# Altium PCB Beacon.PcbDoc
Units mil, origin at the board's own origin, x right, y up, seen from the top; angles counter-clockwise.
Board outline 2700 x 2700 mil, 2 copper layers (Top Layer, Bottom Layer); 74 components, 48 nets, 207 pads, 3 vias.
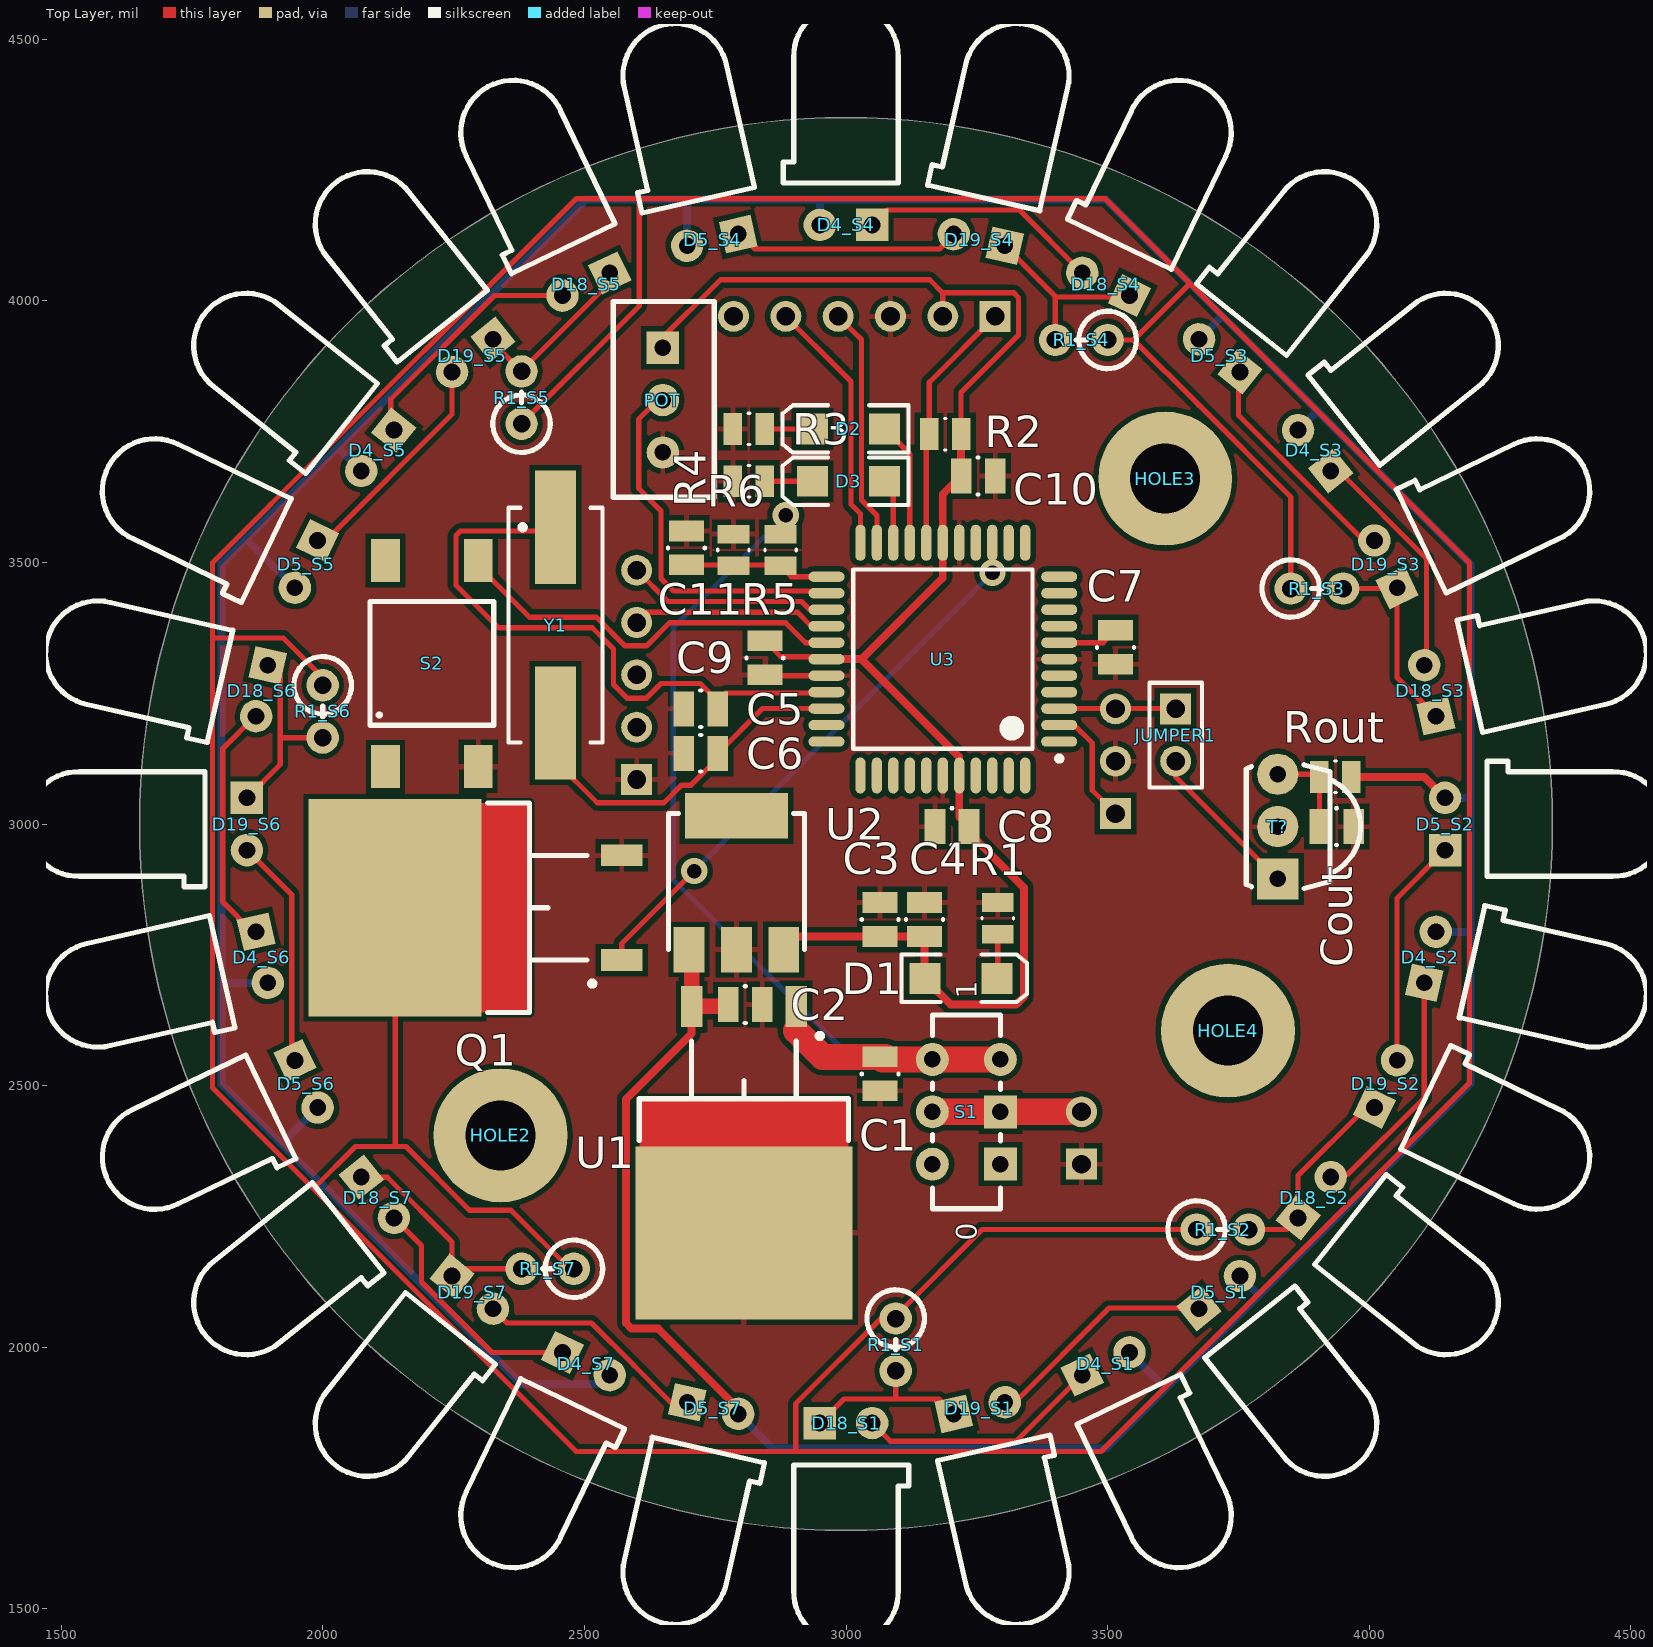
[diagram p0: Top Layer view]
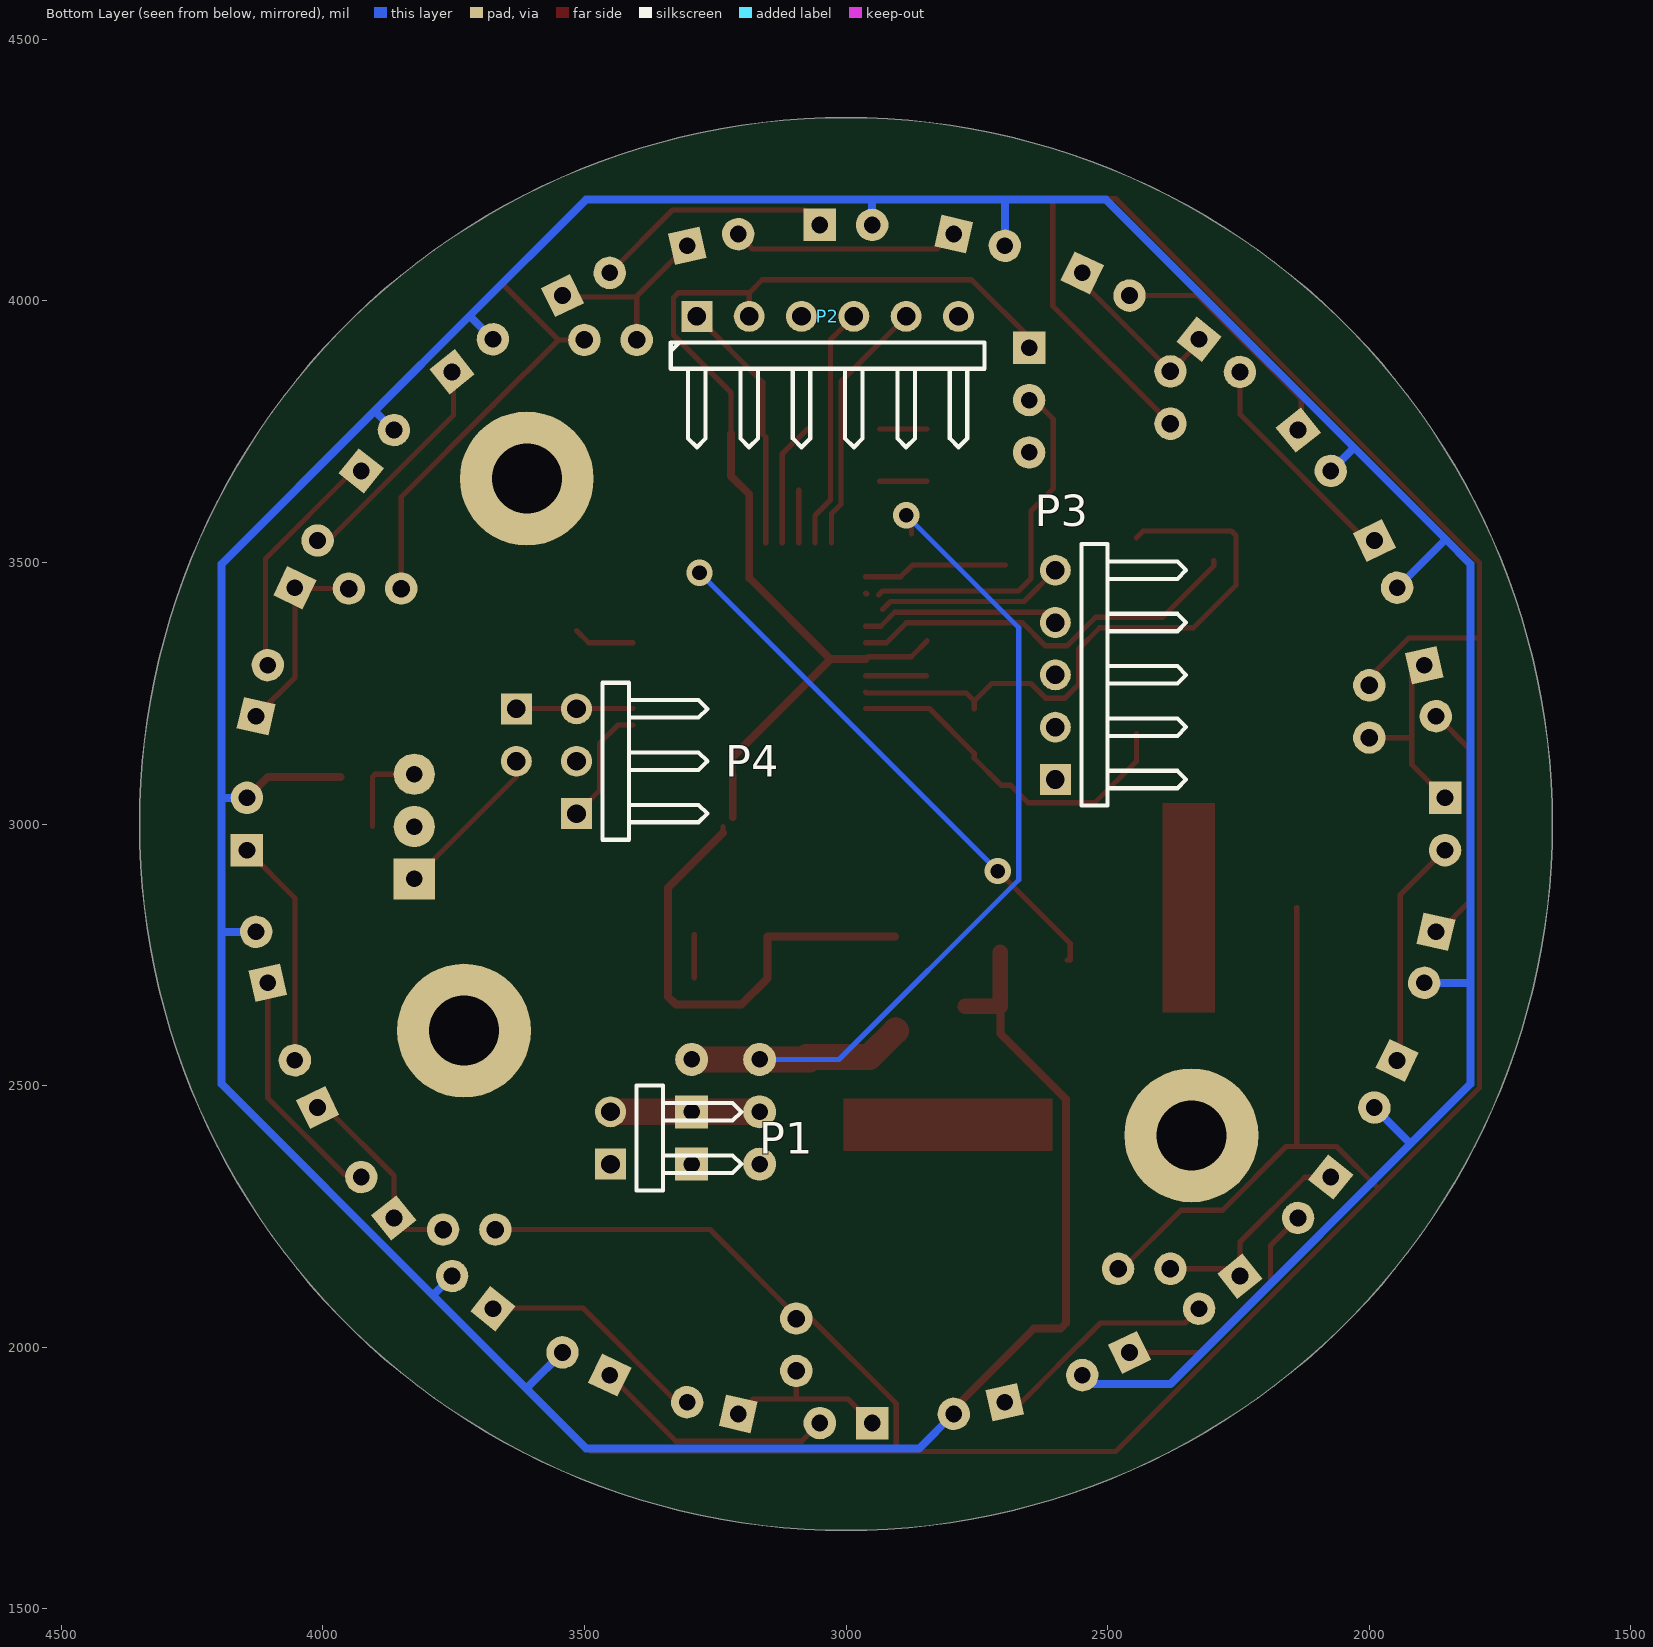
[diagram p1: Bottom Layer view, seen from below]
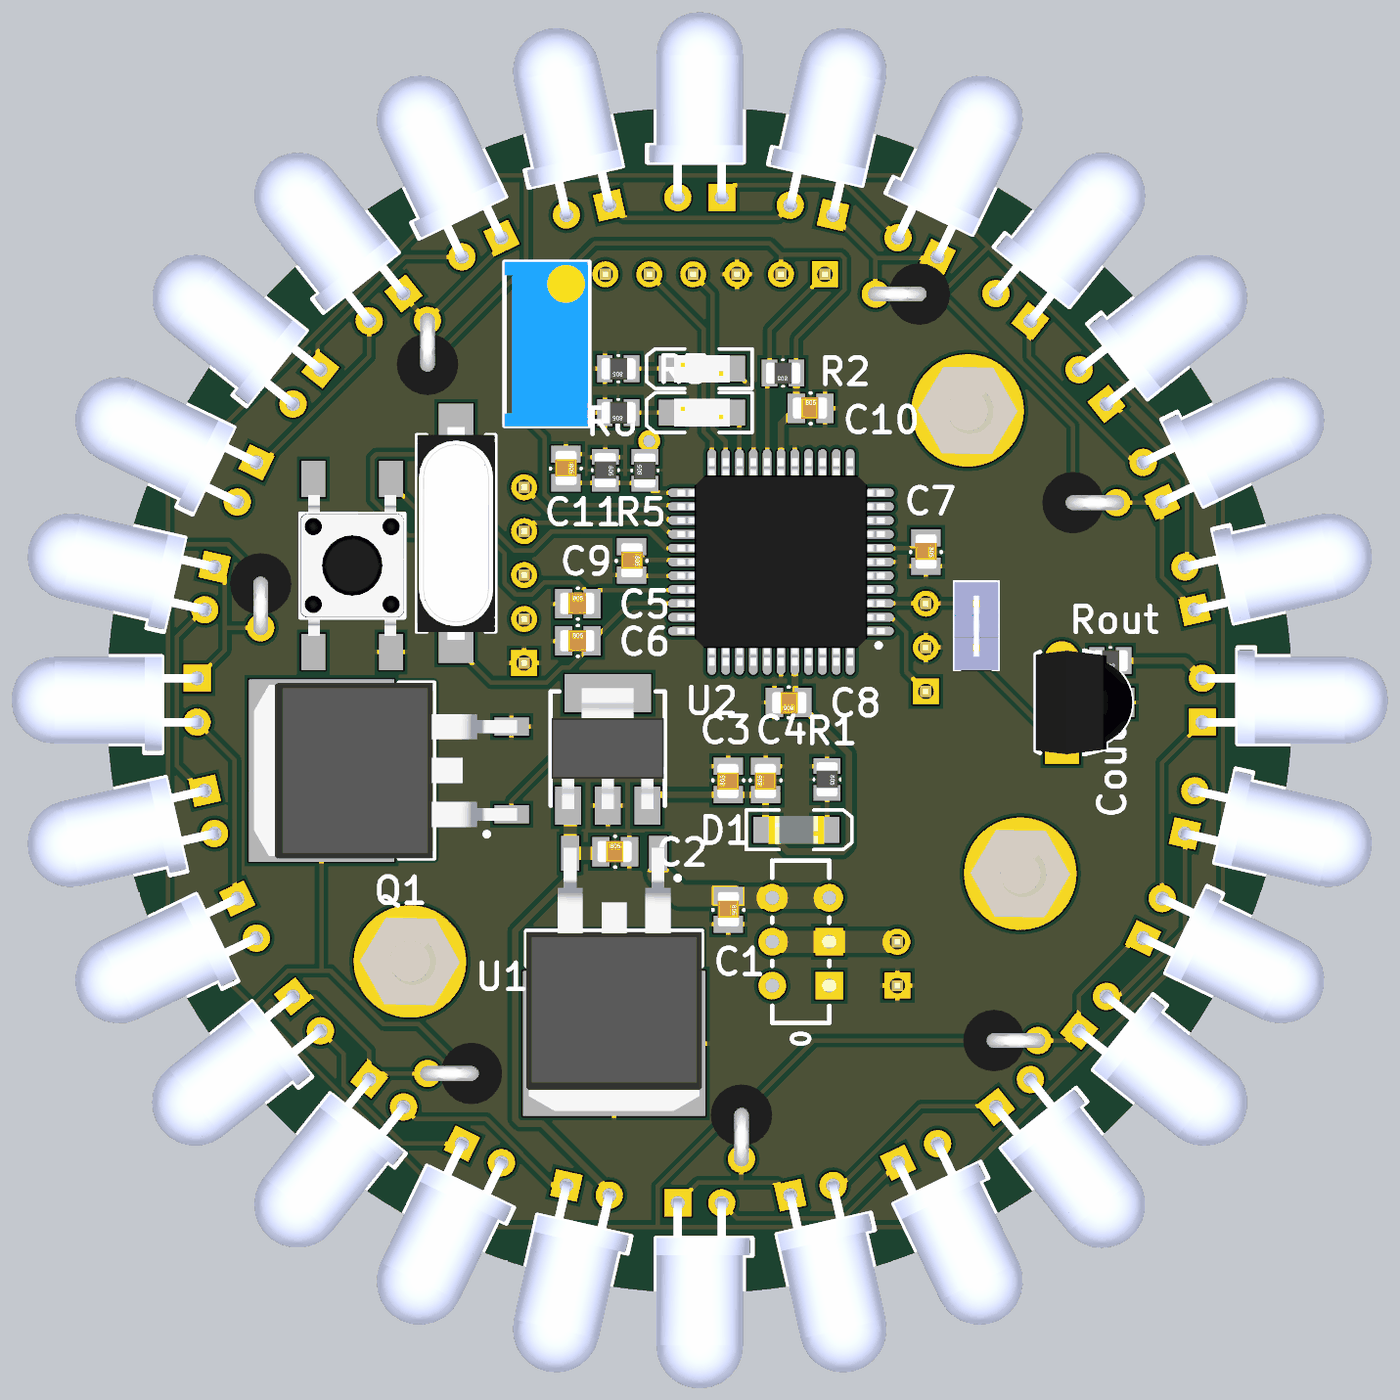
[diagram p2: 3D render of the assembled board from above, using the file's embedded part models]
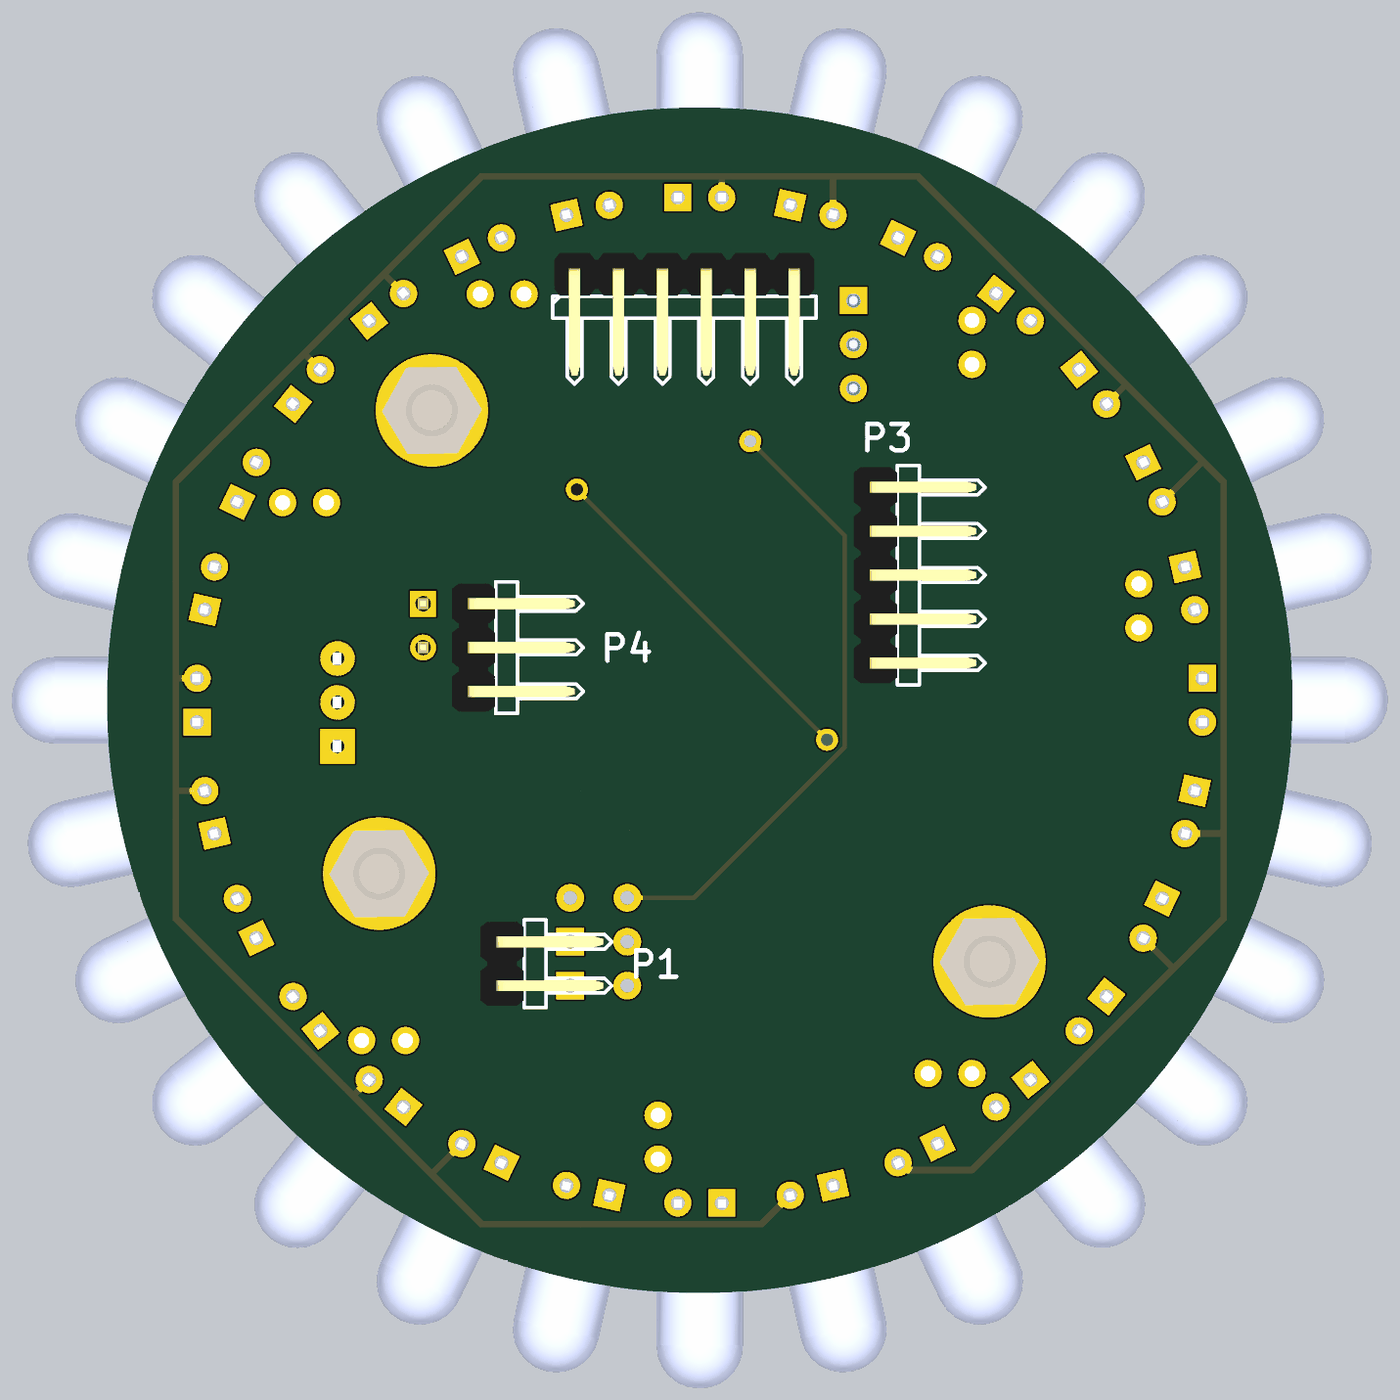
[diagram p3: 3D render of the assembled board from below, using the file's embedded part models]

## Layer stack, top to bottom
Top Layer: signal copper 1.4
Dielectric: dielectric 12.6, FR-4, Dk 4.8
Bottom Layer: signal copper 1.4

## Board outline
3000,1650 cw(c3000,3000) 1650,3000 cw(c3000,3000) 3000,4350 cw(c3000,3000) 4350,3000 cw(c3000,3000)

## Design rules (kind name [scope] priority, off if disabled: settings)
Clearance [All] p1: gap=10
HoleSize [All] p1: absolutevalues=TRUE maxlimit=140 minlimit=1 maxpercent=80.000 minpercent=20.000
MinimumSolderMaskSliver [All] p1: minsoldermaskwidth=1
PolygonConnect [All] p1: connectstyle=Relief reliefconductorwidth=10 reliefentries=4 polygonreliefangle="90 Angle"
RoutingVias [All] p1: holewidth=28 width=50 viastyle="Through Hole" minholewidth=28 minwidth=50 maxholewidth=28 maxwidth=50
SilkToSilkClearance [All] p1: silktosilkclearance=1
SilkscreenOverComponentPads [All] p1: minsilkscreentomaskgap=1
SolderMaskExpansion [All] p1: expansion=4
Width Width_2 [(InNet('VBAT') OR InNet('NetP1_2'))] p1: maxlimit=50 minlimit=5 preferedwidth=50
Width Width_1 [InNet('+5V0')] p2: maxlimit=50 minlimit=15 preferedwidth=15
Width [All] p3: maxlimit=20 minlimit=10 preferedwidth=10
24 further rules are at their usual default settings.

## Classes and differential pairs
component class beacon1: C1 C2 C3 C4 C5 C6 C7 C8 C9 C10 C11 Cout D1 D2 D3 HOLE2 HOLE3 HOLE4 JUMPER1 P1 P3 P4 POT Q1 R1 R2 R3 R4 R5 R6 Rout S1 S2 T? U1 U2 U3 Y1
component class S1: D4_S1 D5_S1 D18_S1 D19_S1 R1_S1
component class S2: D4_S2 D5_S2 D18_S2 D19_S2 R1_S2
component class S3: D4_S3 D5_S3 D18_S3 D19_S3 R1_S3
component class S4: D4_S4 D5_S4 D18_S4 D19_S4 R1_S4
component class S5: D4_S5 D5_S5 D18_S5 D19_S5 R1_S5
component class S6: D4_S6 D5_S6 D18_S6 D19_S6 R1_S6
component class S7: D4_S7 D5_S7 D18_S7 D19_S7 R1_S7
channel class emitter: S1 S2 S3 S4 S5 S6 S7

## Components (designator, comment, footprint, x,y, rotation, side; value= is the part's Value field where it differs from the comment)
C1 "" C0805C 3065,2555 r270 top
C2 "" C0805C 2775,2655 r0 top
C3 "" C0805C 3065,2785 r90 top
C4 "" C0805C 3150,2785 r90 top
C5 "CAP" C0805C 2690,3220 r0 top
C6 "CAP" C0805C 2690,3135 r0 top
C7 "" C0805C 3515,3370 r270 top
C8 "" C0805C 3235,2995 r180 top
C9 "" C0805C 2845,3350 r270 top
C10 "" C0805C 3220,3665 r0 top
C11 "CAP" C0805C 2695,3560 r270 top
Cout "CAP" C0805C 3905,2995 r0 top
D1 "LED2" LED1206G 3220,2705 r0 top
D2 "LED2" LED1206R 3005,3755 r180 top
D3 "LED2" LED1206R 3005,3655 r180 top
D4_S1 "LED" "LED 5MM Horiz" 3000,3000 r25.71 top (schematic designator D4)
D4_S2 "LED" "LED 5MM Horiz" 3000,3000 r77.14 top (schematic designator D4)
D4_S3 "LED" "LED 5MM Horiz" 3000,3000 r128.57 top (schematic designator D4)
D4_S4 "LED" "LED 5MM Horiz" 3000,3000 r180 top (schematic designator D4)
D4_S5 "LED" "LED 5MM Horiz" 3000,3000 r231.43 top (schematic designator D4)
D4_S6 "LED" "LED 5MM Horiz" 3000,3000 r282.86 top (schematic designator D4)
D4_S7 "LED" "LED 5MM Horiz" 3000,3000 r334.29 top (schematic designator D4)
D5_S1 "LED" "LED 5MM Horiz" 3000,3000 r38.57 top (schematic designator D5)
D5_S2 "LED" "LED 5MM Horiz" 3000,3000 r90 top (schematic designator D5)
D5_S3 "LED" "LED 5MM Horiz" 3000,3000 r141.43 top (schematic designator D5)
D5_S4 "LED" "LED 5MM Horiz" 3000,3000 r192.86 top (schematic designator D5)
D5_S5 "LED" "LED 5MM Horiz" 3000,3000 r244.29 top (schematic designator D5)
D5_S6 "LED" "LED 5MM Horiz" 3000,3000 r295.72 top (schematic designator D5)
D5_S7 "LED" "LED 5MM Horiz" 3000,3000 r347.14 top (schematic designator D5)
D18_S1 "LED" "LED 5MM Horiz" 3000,3000 r0 top (schematic designator D18)
D18_S2 "LED" "LED 5MM Horiz" 3000,3000 r51.43 top (schematic designator D18)
D18_S3 "LED" "LED 5MM Horiz" 3000,3000 r102.86 top (schematic designator D18)
D18_S4 "LED" "LED 5MM Horiz" 3000,3000 r154.29 top (schematic designator D18)
D18_S5 "LED" "LED 5MM Horiz" 3000,3000 r205.71 top (schematic designator D18)
D18_S6 "LED" "LED 5MM Horiz" 3000,3000 r257.14 top (schematic designator D18)
D18_S7 "LED" "LED 5MM Horiz" 3000,3000 r308.57 top (schematic designator D18)
D19_S1 "LED" "LED 5MM Horiz" 3000,3000 r12.86 top (schematic designator D19)
D19_S2 "LED" "LED 5MM Horiz" 3000,3000 r64.29 top (schematic designator D19)
D19_S3 "LED" "LED 5MM Horiz" 3000,3000 r115.71 top (schematic designator D19)
D19_S4 "LED" "LED 5MM Horiz" 3000,3000 r167.14 top (schematic designator D19)
D19_S5 "LED" "LED 5MM Horiz" 3000,3000 r218.57 top (schematic designator D19)
D19_S6 "LED" "LED 5MM Horiz" 3000,3000 r270 top (schematic designator D19)
D19_S7 "LED" "LED 5MM Horiz" 3000,3000 r321.43 top (schematic designator D19)
HOLE2 "Hole" SCREW 2340,2405 r0 top
HOLE3 "Hole" SCREW 3610,3660 r0 top
HOLE4 "Hole" SCREW 3730,2605 r0 top
JUMPER1 "ENABLE_TSOP" HDR1X2J 3630,3220 r270 top
P1 "Battery" HDR1X2H 3450,2350 r90 bottom
P2 "PICkit" HDR1X6H 3285,3970 r180 bottom
P3 "FTDI Cable" HDR1X5H 2600,3085 r90 bottom
P4 "SYNC" HDR1X3H 3515,3020 r90 bottom
POT "1K" "VR5 POT" 2650,3910 r270 top
Q1 "IRF640NS" D2PAK 2355,2840 r90 top
R1 "" C0805R 3290,2850 r270 top
R1_S1 "RES" "AXIAL0.8 Vert" 3095,2055 r270 top (schematic designator R1)
R1_S2 "RES" "AXIAL0.8 Vert" 3670,2225 r0 top (schematic designator R1)
R1_S3 "RES" "AXIAL0.8 Vert" 3850,3450 r0 top (schematic designator R1)
R1_S4 "RES" "AXIAL0.8 Vert" 3500,3925 r180 top (schematic designator R1)
R1_S5 "RES" "AXIAL0.8 Vert" 2380,3765 r90 top (schematic designator R1)
R1_S6 "RES" "AXIAL0.8 Vert" 2000,3265 r270 top (schematic designator R1)
R1_S7 "RES" "AXIAL0.8 Vert" 2480,2150 r180 top (schematic designator R1)
R2 "" C0805R 3220,3745 r180 top
R3 "" C0805R 2845,3755 r180 top
R4 "" C0805R 2845,3655 r180 top
R5 "RES" C0805R 2875,3493.07 r90 top
R6 "RES" C0805R 2785,3554.09 r270 top
Rout "RES" C0805R 3965.67,3090 r180 top
S1 "SW-DPDT/Reset" MCLSS22 3295,2450 r90 top
S2 "SPST-NO" SPST-NO 2120,3110 r0 top
T? "TSOP7000" "TSOP IR" 2410.67,2995 r90 top
U1 "L7805CD2T" D2PAK 2805,2435 r180 top
U2 "LM2937IMP-3.3" SOT223 2700,2760 r0 top
U3 "DSPIC33FJ64MC804-I/PT" TQFP-PT44_N 3185,3315 r180 top
Y1 "XTAL" "HC49SMD C" 2445,3380 r270 top

## Footprints (in the part's own frame and the unit in brackets; to place one, negate y for a bottom-side part, rotate by r counter-clockwise, add the part's x,y. Pads: shape width x height; smd on the part's side, far side on the other; paste and mask are expansions set on the pad)
"AXIAL0.8 Vert" [mil] "Resistor 1/4W vertical"
  round 62 hole 33.46: 1(0,0) 2(100,0)
  silkscreen extent -55,-55 60,55, body extent -70,-70 117,70, height 435
C0805C [mm]
  rect 1x1.7 smd: 1(0,0) 2(1.65,0)
  silkscreen extent 0.8,-0.89 0.85,0.89, body extent -0.21,-0.61 1.79,0.64, height 0.78
C0805R [mm]
  rect 0.9x1.55 smd: 1(0,0) 2(1.55,0)
  silkscreen extent 0.73,-0.76 0.81,0.76, body extent -0.24,-0.62 1.76,0.63, height 0.78
D2PAK [mm] "Power SMT D2-PAK/TO-263-AB; 3 Leads (1 Cropped); Body 15.5 (inc. leads) x 10.5 mm (LxW max)"
  rect 1.05x2 smd: 1(-2.54,-5.5) 3(2.54,-5.5)
  rect 10.55x8.4 smd: 2(0,5.5)
  Top Layer region: -5.08,-1.016 5.08,-1.016 5.08,1.524 -5.08,1.524
  silkscreen extent -5.08,-4.19 5.08,1.02, body extent -5.08,-5.86 5.08,9.4, height 4.78
"HC49SMD C" [mm] "Quartz Crystal, SMD thickness C; Body 13.4 (inc. leads) x 4.9 mm (LxW max)"
  rect 5.5x2 smd: 1(-4.75,0) 2(4.75,0)
  silkscreen extent -5.7,-2.29 5.7,2.29, body extent -6.15,-2.25 6.15,2.25, height 3.6
HDR1X2H [mm] "Connector; Header; 2 Position; Right Angle"
  rect 1.5x1.5 hole 0.9: 1(0,0)
  round 1.5 hole 0.9: 2(2.54,0)
  silkscreen extent -1.27,-6.35 3.81,-1.27, body extent -1.17,-5.85 3.71,1.25, height 5.42
HDR1X2J [mm] "Jumper; Connector; Header; 2 Position"
  rect 1.5x1.5 hole 0.9: 1(0,0)
  round 1.5 hole 0.9: 2(2.54,0)
  silkscreen extent -1.27,-1.27 3.81,1.27, body extent -1.24,-1.27 3.91,1.27, height 8.55
HDR1X3H [mm] "Connector; Header; 3 Position; Right Angle"
  rect 1.5x1.5 hole 0.9: 1(0,0)
  round 1.5 hole 0.9: 2(2.54,0) 3(5.08,0)
  silkscreen extent -1.27,-6.35 6.35,-1.27, body extent -1.17,-5.85 6.25,1.25, height 5.42
HDR1X5H [mm] "Connector; Header; 5 Position; Right Angle"
  rect 1.5x1.5 hole 0.9: 1(0,0)
  round 1.5 hole 0.9: 2(2.54,0) 3(5.08,0) 4(7.62,0) 5(10.16,0)
  silkscreen extent -1.27,-6.35 11.43,-1.27, body extent -1.17,-5.85 11.33,1.25, height 5.42
HDR1X6H [mm] "Connector; Header; 6 Position; Right Angle"
  rect 1.5x1.5 hole 0.9: 1(0,0)
  round 1.5 hole 0.9: 2(2.54,0) 3(5.08,0) 4(7.62,0) 5(10.16,0) 6(12.7,0)
  silkscreen extent -1.27,-6.35 13.97,-1.27, body extent -1.17,-5.85 13.87,1.25, height 5.42
LED1206G [mm] "SMT LED; 2 Flat Leads; 3.2X1.6X1.1"
  rect 1.5x1.5 smd: 1(-1.75,0) 2(1.75,0)
  silkscreen extent -2.9,-1.15 3.2,1.15, body extent -1.6,-0.8 1.6,0.8, height 1.11
LED1206R [mm] "SMT LED; 2 Flat Leads; 3.2X1.6X1.1"
  rect 1.5x1.5 smd: 1(-1.75,0) 2(1.75,0)
  silkscreen extent -2.9,-1.15 3.2,1.15, body extent -1.6,-0.8 1.6,0.8, height 1.11
"LED 5MM Horiz" [mil] "LED 5mm Right Angle"
  round 62 hole 32: A(50,-1144.8)
  rect 62x62 hole 32: K(-50,-1144.8)
  silkscreen extent -100,-1566 120,-1225, body extent -98,-1567 114,-1136, height 232
MCLSS22 [mm] "Slide Switch DPDT"
  rect 1.6x1.6 hole 0.8: 1(0,0) 2(-2.54,0)
  round 1.6 hole 0.8: 3(2.54,0) 4(0,3.3) 5(-2.54,3.3) 6(2.54,3.3)
  silkscreen extent -4.7,0 4.7,3.3, body extent -4.7,-2 4.7,3.3, height 3.5
SCREW [mm] "Mounting Hole M3"
  round 6.5 hole 3.4: 1(0,0)
  body extent -2.89,-2.52 2.89,2.52, height 10
SOT223 [mm]
  rect 1.5x2.2 smd: 1(0,0) 2(2.3,0) 3(4.6,0)
  rect 5x2.2 smd: ""(2.3,6.5)
  silkscreen extent -1,0 5.6,6.6, body extent -0.95,-0.2 5.55,6.8, height 1.64
SPST-NO [mm] "Tactile Switch SPST-NO 6x6mm"
  rect 1.4x2.1 smd: 1(0,0) 2(4.5,0) 3(4.5,10) 4(0,10)
  silkscreen extent -0.75,2 5.25,8, body extent -0.75,0.93 5.25,9.08, height 5
TQFP-PT44_N [mm] "Thin QFP, 44-Leads, Body 10x10mm, Pitch 0.8mm, IPC Medium Density"
  oval 1.75x0.5 smd: 1(-5.65,4) 2(-5.65,3.2) 3(-5.65,2.4) 4(-5.65,1.6) 5(-5.65,0.8) 6(-5.65,0) 7(-5.65,-0.8) 8(-5.65,-1.6) 9(-5.65,-2.4) 10(-5.65,-3.2) 11(-5.65,-4) 23(5.65,-4) 24(5.65,-3.2) 25(5.65,-2.4) 26(5.65,-1.6) 27(5.65,-0.8) 28(5.65,0) 29(5.65,0.8) 30(5.65,1.6) 31(5.65,2.4) 32(5.65,3.2) 33(5.65,4)
  oval 0.5x1.75 smd: 12(-4,-5.65) 13(-3.2,-5.65) 14(-2.4,-5.65) 15(-1.6,-5.65) 16(-0.8,-5.65) 17(0,-5.65) 18(0.8,-5.65) 19(1.6,-5.65) 20(2.4,-5.65) 21(3.2,-5.65) 22(4,-5.65) 34(4,5.65) 35(3.2,5.65) 36(2.4,5.65) 37(1.6,5.65) 38(0.8,5.65) 39(0,5.65) 40(-0.8,5.65) 41(-1.6,5.65) 42(-2.4,5.65) 43(-3.2,5.65) 44(-4,5.65)
  silkscreen extent -5.77,-4.35 4.35,4.95, body extent -6,-6 6,6, height 1.05
"TSOP IR" [mm] "TSOP IR Receiver, Vishay"
  rect 2x2 hole 0.8: 1(-2.54,-35.924)
  round 2 hole 0.8: 2(0,-35.924) 3(2.54,-35.924)
  silkscreen extent -3,-39.95 3,-34.4, body extent -3,-40 3,-34.4, height 8.45
"VR5 POT" [mil] "Potentiometre ajustable"
  rect 62x62 hole 31.5: 1(0,0)
  round 62 hole 31.5: 2(100,0) 3(200,0)
  silkscreen extent -89,-95 285,98, body extent -88,-95 287,96, height 455

## Part data
C1 C2 C3 C4 C7 C8 C9 C10: library part "Cap Semi", "Capacitor (Semiconductor SIM Model)"
C5 C6 C11 Cout: "Capacitor"
D1 D2 D3 D4_S1 D4_S2 D4_S3 D4_S4 D4_S5 D4_S6 D4_S7 D5_S1 D5_S2 D5_S3 D5_S4 D5_S5 D5_S6 D5_S7 D18_S1 D18_S2 D18_S3 D18_S4 D18_S5 D18_S6 D18_S7 D19_S1 D19_S2 D19_S3 D19_S4 D19_S5 D19_S6 D19_S7: "Typical RED, GREEN, YELLOW, AMBER GaAs LED"
HOLE2 HOLE3 HOLE4: "Mounting Hole for screws"
JUMPER1 P1: library part "Header 2", "Header, 2-Pin"
P2: library part "Header ICSP", "Header, 6-Pin, Right Angle"
P3: library part "Header 5", "Header, 5-Pin"
P4: library part "Header 3", "Header, 3-Pin"
POT: library part POT, "Potentiometer"
Q1: library part IRF640, "N-Channel MOSFET, D2PAK (T0-263), InternationalRectifier"
R1 R2 R3 R4: library part Res3, "Resistor"
R1_S1 R1_S2 R1_S3 R1_S4 R1_S5 R1_S6 R1_S7 R5 R6 Rout: "Resistor"
S1: library part SW-DPDT, "Double-Pole, Double-Throw Switch"
S2: "Tactile Switch 7.3mm, SMD"
T?: "Vishay 455kHz IR Receiver"
U1: "5V Linear Regulator, D2PAK, ST Microelectronics"
U2: "500 mA Low Dropout Regulator"
U3: "High-Performance 16-bit Digital Signal Controller, 64 KB Flash, 16 KB RAM, 44-Pin TQFP, Industrial Temperature"
Y1: "Crystal Oscillator"

## Via types
v1: diameter 50, hole 28, Top Layer to Bottom Layer, 3 vias

## Nets (pads, with @x,y where several pads share a name; then routed paths per layer and width w, separated by ;. In a path a pad name is that pad's centre, name@x,y a point inside that pad or via, vN(x,y) a via of type N, cw(c..) or ccw(c..) an arc to the next point about the centre after c; other vN are vias at no path point)
+3V3: C3.1 C4.1 C8.1 C9.1 C10.1 D1.1 P2.2 POT.1 R2.1 U2.3 U3.17 U3.28 U3.40 | length 3109
  Top Layer w10: POT.1@2640,3910 2640,3920 2760,4040 3160,4040 3185,4015 ; C9.1 2875.28,3319.72 2957.83,3319.72 U3.28 ; D1.1@3151.1,2703.9 D1.1 ; P2.2 3185,4015 ; U3.40 3216.5,3128.21 ; R2.1 3220,3824.73 3329.53,3934.26 3329.53,4005.74 3320.74,4014.53 ; C8.1@3235,2983.23 C8.1 ; 3320.74,4015 3185,4015
  Top Layer w15: U2.3@2906.1,2785 C3.1 C4.1 D1.1@3150,2706.1 ; U3.28 3029.71,3315 ; D1.1@3151.1,2703.9 3200,2655 3325,2655 3340,2670 3340,2878.23 C8.1@3235,2983.23 ; C8.1@3216.5,3013.5 U3.40 ; 3216.5,3128.21 3029.71,3315 ; R2.1 C10.1 3185,3630 U3.17 3185,3470.29 3029.71,3315
+5V0: C2.1 D4_S1.A D4_S2.A D4_S3.A D4_S4.A D4_S5.A D4_S6.A D4_S7.A D5_S1.A D5_S2.A D5_S3.A D5_S4.A D5_S5.A D5_S6.A D5_S7.A Rout.1 U1.3 U2.1 | length 9835.4
  Top Layer w15: U1.3 2705,2599.75 2579.82,2474.57 2579.82,2045.86 2590.07,2035.61 2641.08,2035.61 2793.95,1882.74 D5_S7.A ; Rout.1 4104.8,3090 D5_S2.A
  Top Layer w30: U2.1@2705,2755 U1.3 C2.1@2771.54,2651.54
  Bottom Layer w15: D4_S6.A 1808.15,2696.46 1806.7,2695 ; 1921.11,2388.93 D5_S6.A ; D5_S5.A 1855.02,3543.4 1855.02,3544.98 ; 2035,3713.42 D4_S5.A ; D4_S7.A@2540,1930 2380.05,1930 1806.7,2503.35 1806.7,2695 ; D5_S4.A 2696.46,4191.85 2695,4193.3 ; D5_S7.A 2860.03,1806.7 3496.65,1806.7 3792.48,2102.52 ; D4_S4.A 2950,4193.3 ; D4_S1.A 3605,1926.91 ; D5_S3.A 3718.42,3970 3719.95,3970 ; D5_S1.A 3786.43,2102.52 3792.48,2102.52 ; D4_S3.A 3899.95,3788.91 3899.95,3790 ; D4_S2.A 4192.25,2793.95 4193.3,2795 ; D5_S2.A 4193.3,3050 ; 1806.7,2695 1806.7,3496.65 1855.02,3544.98 ; 1855.02,3544.98 2503.35,4193.3 2695,4193.3 ; 2695,4193.3 2950,4193.3 ; 2950,4193.3 3496.65,4193.3 3719.95,3970 ; 3719.95,3970 3899.95,3790 ; 3792.48,2102.52 4193.3,2503.35 4193.3,2795 ; 3899.95,3790 4193.3,3496.65 4193.3,3050 ; 4193.3,2795 4193.3,3050
GATE: Q1.1 U3.14 | length 1039.8
  Top Layer w10: Q1.1@2577.17,2740 Q1.1 2571.54,2771.54 v1(2710,2910) ; v1@3279.49,3480.51 v1(3280,3480)
  Bottom Layer w10: v1(2710,2910) v1(3280,3480)
GND: C1.2 C2.2 C3.2 C4.2 C5.1 C6.1 C7.2 C8.2 C9.2 C10.2 C11.1 Cout.2 P1.1 P2.3 P3.1 P4.2 POT.3 Q1.3 R1.1 R3.2 R4.2 R6.1 S2.2 T?.2 U1.2 U2.2 U3.6 U3.16 U3.29 U3.39 | length 116
  Top Layer w10: C9.2@2846.54,3283.5 U3.29
MCLR: P2.1 R2.2 U3.18 | length 479.3
  Top Layer w10: U3.18 R2.2@3153.5,3739.53 ; R2.2 3158.98,3843.98 P2.1
NetC7_1: C7.1 U3.7 | length 117.3
  Top Layer w10: U3.7 3491.5,3346.5 C7.1
NetC11_2: C11.2 R5.1 R6.2 U3.23 | length 274.1
  Top Layer w10: C11.2 R5.1@2873.03,3495.04 ; R5.1 2895.59,3472.48 U3.23
NetCout_1: Cout.1 Rout.2 T?.3 | length 176.4
  Top Layer w10: T?.3 3899.65,3095 Rout.2 Cout.1@3904.65,2995.35
NetD1_2: D1.2 R1.2 | length 82.9
  Top Layer w10: D1.2@3290,2706.1 R1.2
NetD2_1: D2.1 U3.19 | length 237.5
  Top Layer w10: D2.1 3122.01,3706.89 U3.19
NetD2_2: D2.2 R3.1 | length 91.1
  Top Layer w10: R3.1 D2.2
NetD3_1: D3.1 U3.20 | length 100.9
  Top Layer w10: U3.20 D3.1@3090.51,3638.39
NetD3_2: D3.2 R4.1 | length 91.1
  Top Layer w10: R4.1 D3.2
NetD4_S1_K: D4_S1.K D18_S1.A | length 468.2
  Top Layer w10: D18_S1.A 3084.54,1820.66 3325.41,1820.66 D4_S1.K
NetD4_S2_K: D4_S2.K D18_S2.A | length 461.3
  Top Layer w10: D18_S2.A 3930.89,2330 3958.54,2330 4104.96,2476.42 D4_S2.K
NetD4_S3_K: D4_S3.K D18_S3.A | length 458.4
  Top Layer w10: D4_S3.K 3926.58,3675 3941.52,3675 4109.54,3506.98 4109.54,3308.12 D18_S3.A
NetD4_S4_K: D4_S4.K D18_S4.A | length 463.2
  Top Layer w10: D4_S4.K 3050,4145 3078.22,4173.22 3331.53,4173.22 D18_S4.A
NetD4_S5_K: D4_S5.K D18_S5.A | length 471.8
  Top Layer w10: D4_S5.K 2130,3758.96 2130,3811.78 2327.99,4009.78 D18_S5.A
NetD4_S6_K: D4_S6.K D18_S6.A | length 469.7
  Top Layer w10: D4_S6.K 1866.05,2793.95 1809.2,2850.8 1809.2,3144.2 1871.05,3206.05 D18_S6.A
NetD4_S7_K: D4_S7.K D18_S7.A | length 469.5
  Top Layer w10: D18_S7.A 2188.59,2194.68 2188.59,2124.99 2323.36,1990.22 D4_S7.K
NetD5_S1_K: D5_S1.K D19_S1.A | length 446.2
  Top Layer w10: D19_S1.A 3322.71,1895.04 3502.67,2075 3673.42,2075 D5_S1.K
NetD5_S2_K: D5_S2.K D19_S2.A | length 439.8
  Top Layer w10: D19_S2.A 4052.84,2548.74 4052.84,2858.03 D5_S2.K
NetD5_S3_K: D5_S3.K D19_S3.A | length 444.2
  Top Layer w10: D5_S3.K 3750,3861.04 3750,3781.21 3991.21,3540 4008.09,3540 D19_S3.A
NetD5_S4_K: D5_S4.K D19_S4.A | length 436.3
  Top Layer w10: D5_S4.K 2797.78,4127.22 2826.2,4098.8 3178.8,4098.8 3206.05,4126.05 D19_S4.A
NetD5_S5_K: D5_S5.K D19_S5.A | length 439.2
  Top Layer w10: D5_S5.K 1991.91,3540 2004.16,3540 2247.16,3783 D19_S5.A
NetD5_S6_K: D5_S6.K D19_S6.A | length 439.8
  Top Layer w10: D19_S6.A 1941.04,2864.16 1941.04,2554.11 D5_S6.K
NetD5_S7_K: D5_S7.K D19_S7.A | length 445.3
  Top Layer w10: D19_S7.A 2352.51,2046.6 2513.71,2046.6 2594.42,1965.89 2594.42,1965.58 2664.96,1895.04 D5_S7.K
NetD18_S1_K: D18_S1.K D19_S1.K R1_S1.2 | length 335.7
  Top Layer w10: D18_S1.K 2996,1901.2 3177.64,1901.2 D19_S1.K ; 3095,1906.2 R1_S1.2
NetD18_S2_K: D18_S2.K D19_S2.K R1_S2.2 | length 383.8
  Top Layer w10: R1_S2.2 3841.73,2225 D18_S2.K 3863.89,2328.05 3990.84,2455 4006.46,2455 D19_S2.K
NetD18_S3_K: D18_S3.K D19_S3.K R1_S3.2 | length 380
  Top Layer w10: R1_S3.2 4051.58,3450 D19_S3.K 4053.16,3280.11 D18_S3.K
NetD18_S4_K: D18_S4.K D19_S4.K R1_S4.2 | length 367.5
  Top Layer w10: D19_S4.K 3373.5,4035 3401.34,4007.16 ; R1_S4.2@3400,3920 3400,4005.82 3401.34,4007.16 ; D18_S4.K 3539.07,4007.16 3401.34,4007.16
NetD18_S5_K: D18_S5.K D19_S5.K R1_S5.2 | length 341.4
  Top Layer w10: D19_S5.K 2325.34,3919.66 R1_S5.2 ; R1_S5.2@2379.3,3865.7 2545,4031.41 2545,4049.74 D18_S5.K
NetD18_S6_K: D18_S6.K D19_S6.K R1_S6.2 | length 371.8
  Top Layer w10: D19_S6.K 1918.78,3113.59 1918.78,3165 ; D18_S6.K 1896.46,3303.54 1918.78,3281.22 1918.78,3165 ; R1_S6.2 1918.78,3165
NetD18_S7_K: D18_S7.K D19_S7.K R1_S7.2 | length 451.6
  Top Layer w10: D18_S7.K 2074.11,2325 2123.32,2325 2247.16,2201.17 D19_S7.K ; D19_S7.K@2263.5,2119.77 D19_S7.K ; R1_S7.2 2261.04,2150 D19_S7.K
NetJUMPER1_2: JUMPER1.2 T?.1 | length 305.8
  Top Layer w10: JUMPER1.2 3630,3090 T?.1
NetP1_2: P1.2 S1.1 S1.4 | length 284.9
  Top Layer w50: S1.4 S1.1 P1.2
NetQ1_2: Q1.2 R1_S1.1 R1_S2.1 R1_S3.1 R1_S4.1 R1_S5.1 R1_S6.1 R1_S7.1 | length 11618.8
  Top Layer w10: 1900,3610 1789.2,3499.2 1789.2,3355 ; 1900.84,3610.91 2484.93,4195 2605,4195 ; R1_S6.1 2000,3280.24 1924.58,3355.67 1789.86,3355.67 1789.2,3355 ; 2138.46,2387.37 Q1.2 ; R1_S5.1 2605,3990 2605,4195 ; R1_S7.1 2472,2150 2359.95,2262.05 2280.79,2262.05 2158.93,2383.91 2062.64,2383.91 1983.74,2305 1980.3,2305 ; R1_S4.1 3549.7,3925 ; R1_S2.1 3260,2225 3096.22,2061.22 3096.22,2056.22 R1_S1.1 3066.59,2055 2904,1892.41 2904,1800.66 ; R1_S3.1 3850,3624.64 3674.28,3800.36 3674.28,3800.42 3549.7,3925 ; 1789.2,3355 1789.2,2496.1 1980.3,2305 ; 1980.3,2305 2484.64,1800.66 2904,1800.66 ; 2605,4195 3495,4195 3657.35,4032.65 ; 2904,1800.66 3487.08,1800.66 4191.45,2505.03 4191.45,3498.55 3657.35,4032.65 ; 3549.7,3925 3657.35,4032.65
NetS2_3: S2.3 U3.27 | length 773.5
  Top Layer w10: S2.3 2297.17,3492.83 2395,3395 2523.28,3395 2577.81,3340.47 2618.44,3340.47 2662.66,3384.69 2884.68,3384.69 2922.87,3346.5 U3.27
OSC1: C6.2 U3.31 Y1.2 | length 683.6
  Top Layer w10: Y1.2@2445,3172.99 2445,3120 2524.53,3040.47 2652.17,3040.47 2685.91,3074.21 2703.58,3074.21 2754.96,3125.6 C6.2 2840.47,3220.51 U3.31
OSC2: C5.2 U3.30 Y1.1 | length 1194.1
  Top Layer w10: Y1.1@2445,3547.01 2431.97,3560.04 2263.39,3560.04 2254.61,3551.25 2254.61,3456.15 2335.76,3375 2515,3375 2555.47,3334.53 2555.47,3266.56 2581.56,3240.47 2618.44,3240.47 2646.44,3268.46 2721.54,3268.46 2754.96,3235.04 C5.2 2754.96,3234.96 2770.35,3250.35 2960.91,3250.35 U3.30
PGEC: P2.5 U3.22 | length 491.6
  Top Layer w10: P2.5 2994.37,3860.63 3009.37,3845.63 3009.37,3610.97 3027.52,3592.83 U3.22
PGED: P2.4 U3.21 | length 463.2
  Top Layer w10: P2.4 3014.37,3940.63 3029.37,3925.63 3029.37,3619.26 3059.02,3589.61 U3.21
RX: P3.4 U3.26 | length 381.6
  Top Layer w10: P3.4@2600.31,3384.69 2620.31,3404.69 2907.03,3404.69 2933.72,3377.99 U3.26
RX2: JUMPER1.1 P4.3 U3.3 | length 222
  Top Layer w10: U3.3 JUMPER1.1@3629.49,3220.51
TRIM: POT.2 U3.24 | length 680.2
  Top Layer w10: POT.2@2640,3810 2604,3774 2604,3640.95 2646.54,3598.41 2646.54,3469.14 2670.68,3445 2930.3,3445 U3.24@2937.65,3437.65 ; U3.24@2960.33,3440 2961.57,3440 U3.24
TX: P3.5 U3.25 | length 361.1
  Top Layer w10: P3.5 2660,3425 2915,3425 U3.25@2930,3410
TX2: P4.1 U3.2 | length 230.3
  Top Layer w10: U3.2 3435.98,3189.02 3470.47,3154.53 3470.47,3064.53 P4.1
VBAT: C1.1 R5.2 S1.3 S1.6 U1.1 | length 1917.3
  Top Layer w10: R5.2 2875,3580 v1(2885,3590) ; 2905,2605 U1.1@2905,2626.54 ; C1.1@3055,2555 C1.1 C1.1@3070,2550
  Top Layer w50: 2905,2605 2955,2555 C1.1@3075,2555 ; C1.1@3070,2550 S1.6 S1.3
  Bottom Layer w10: v1(2885,3590) 2670,3375 2670,2893.43 3013.43,2550 S1.6
pads on no net: HOLE2.1 HOLE3.1 HOLE4.1 P2.6 P3.2 P3.3 S1.2 S1.5 S2.1 S2.4 U2. U3.1 U3.4 U3.5 U3.8 U3.9 U3.10 U3.11 U3.12 U3.13 U3.15 U3.32 U3.33 U3.34 U3.35 U3.36 U3.37 U3.38 U3.41 U3.42 U3.43 U3.44

## Polygon pours and split planes (outlines as drawn)
GND on Top Layer "Bottom Layer-No Net" (solid, pour order 5): 2484.64,1800.66 3487.08,1800.66 4191.45,2505.03 4191.45,3495 3495,4191.45 3495,4195 2484.93,4195 1789.2,3499.27 1789.2,3499.2 1789.2,2496.1 2484.64,1800.66

## Silkscreen, mask and mechanical layers (free items; w line width, h text height)
Mechanical 1:
  circle w10: c3000,3000 r1350

## Text inside footprints (layer, text, board x,y; h text height)
S1: Top Overlay "1" at 3249.72,2666.54 h39.37 r90; Top Overlay "0" at 3249.72,2203.94 h39.37 r90